# Altium PCB 02 - LcdGraphic128x64.PcbDoc
Units mm, origin at the board's own origin, x right, y up, seen from the top; angles counter-clockwise.
Board outline 80 x 80 mm, 4 copper layers (Top Layer, Internal Plane 1, Internal Plane 2, Bottom Layer), stack 0.462 mm thick; 11 components, 18 nets, 53 pads, 0 vias.
Unrouted connection lines stored in the file: 33.
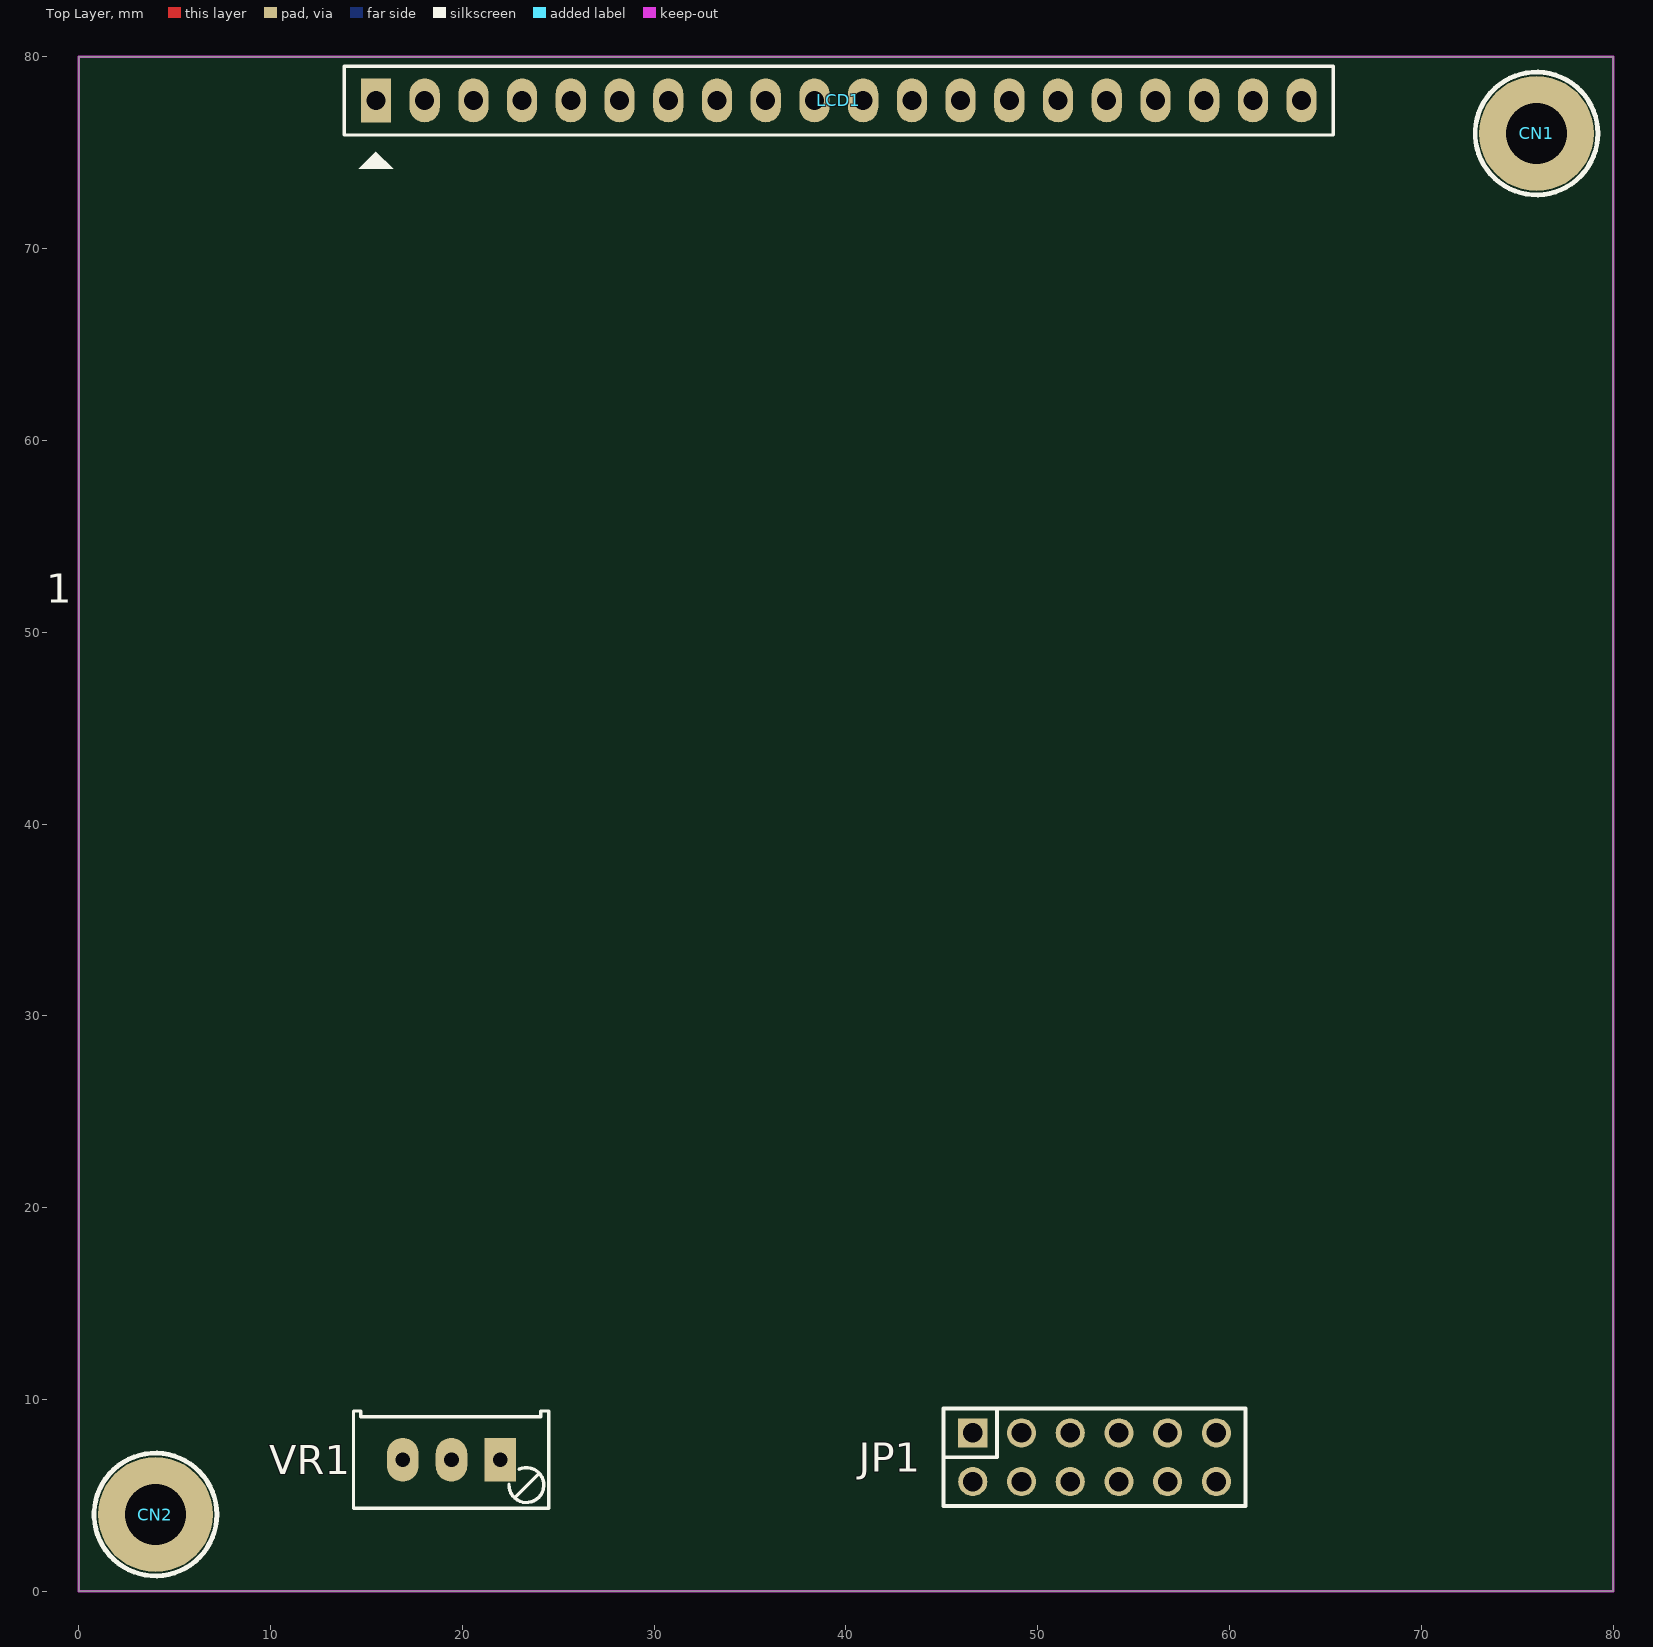
[diagram p0: Top Layer view]
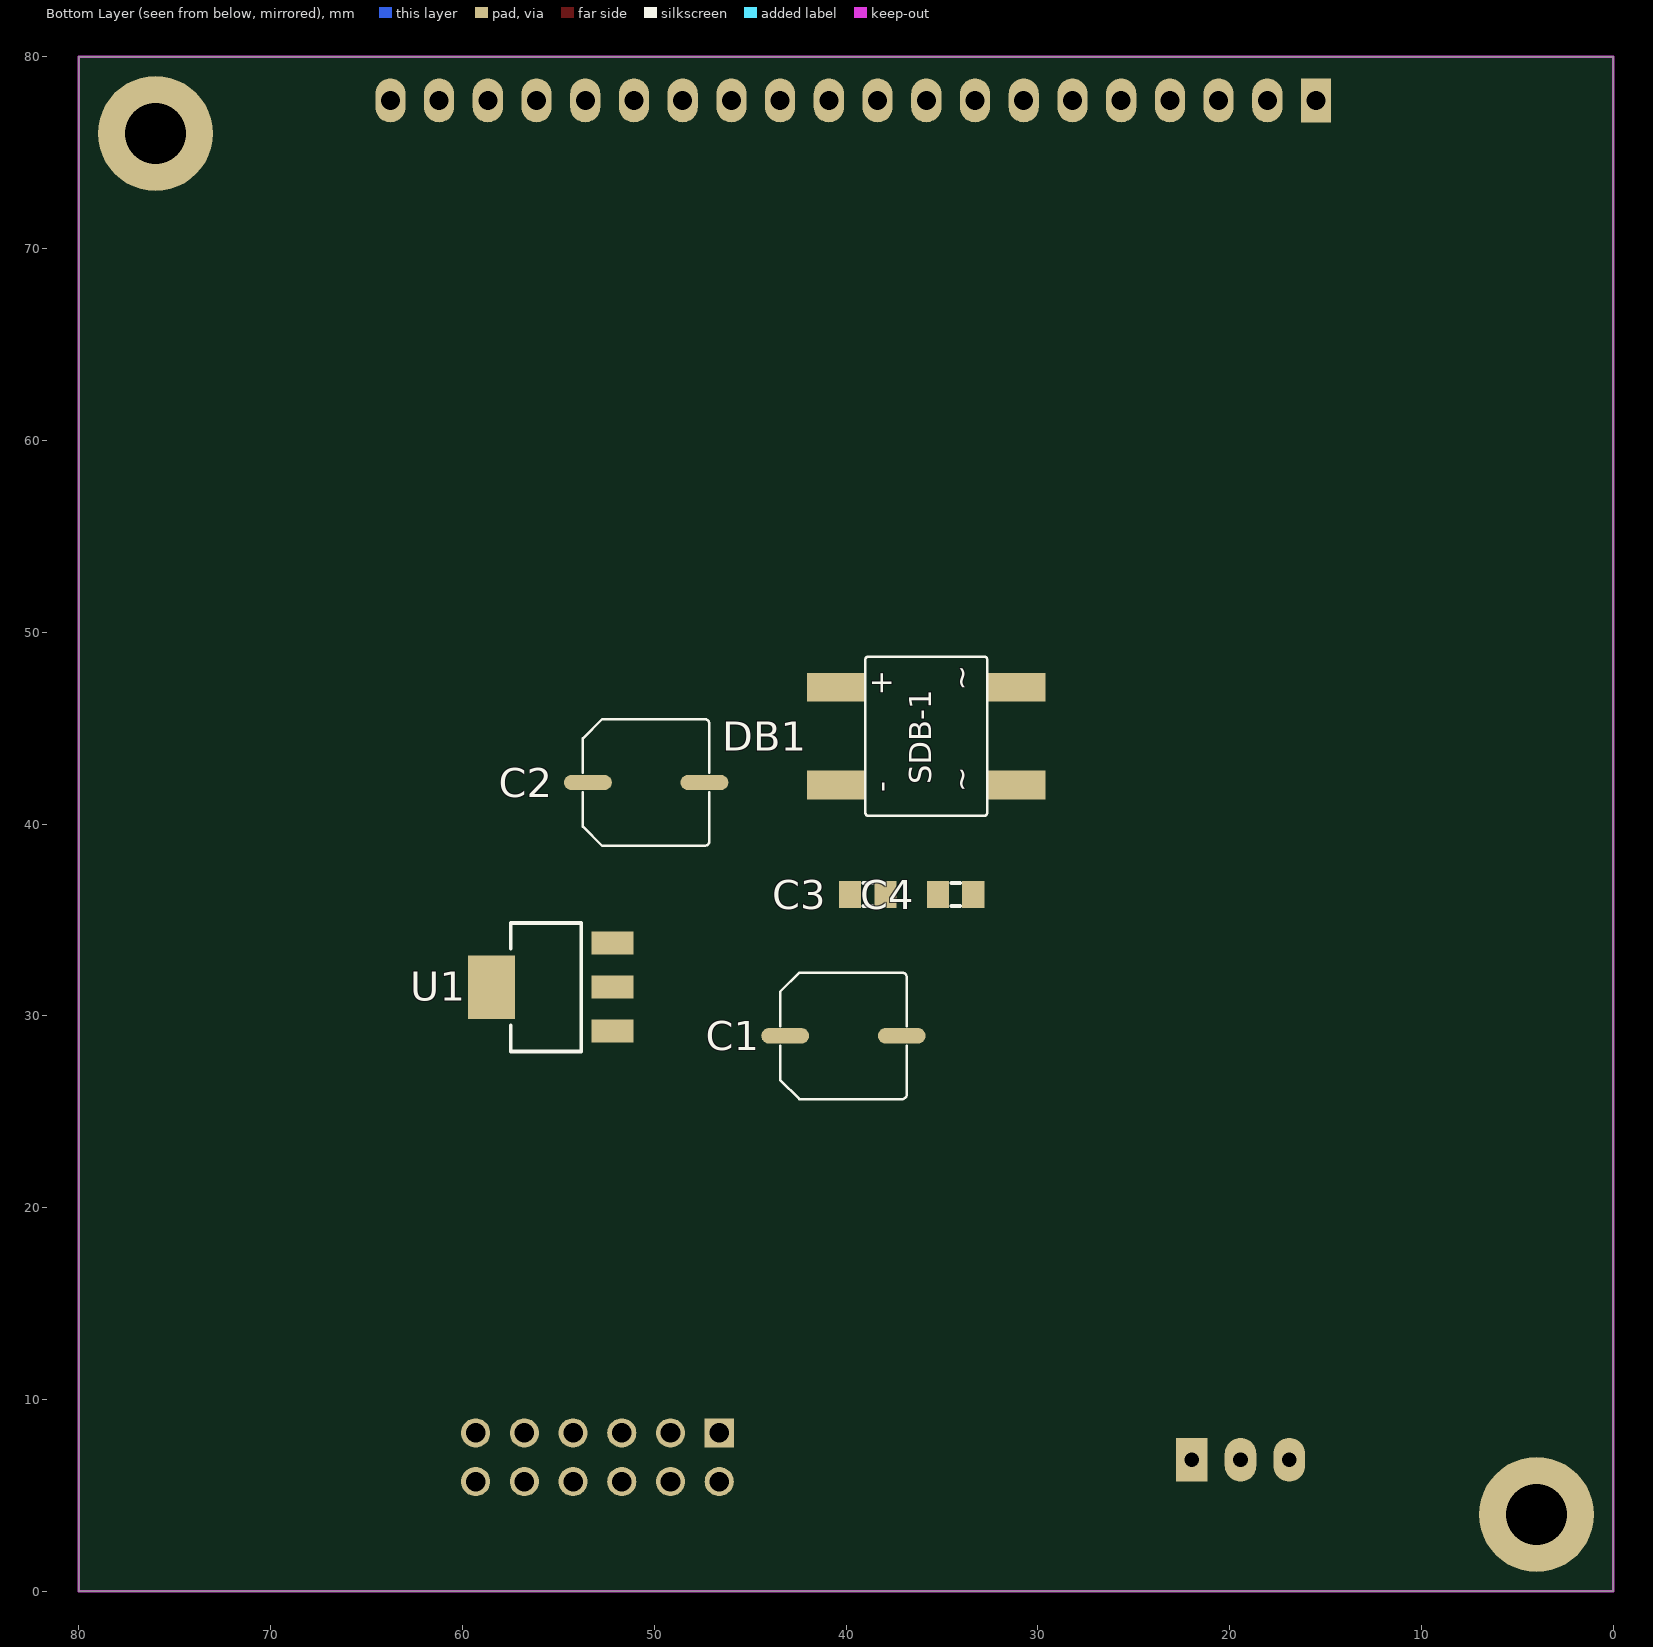
[diagram p1: Bottom Layer view, seen from below]
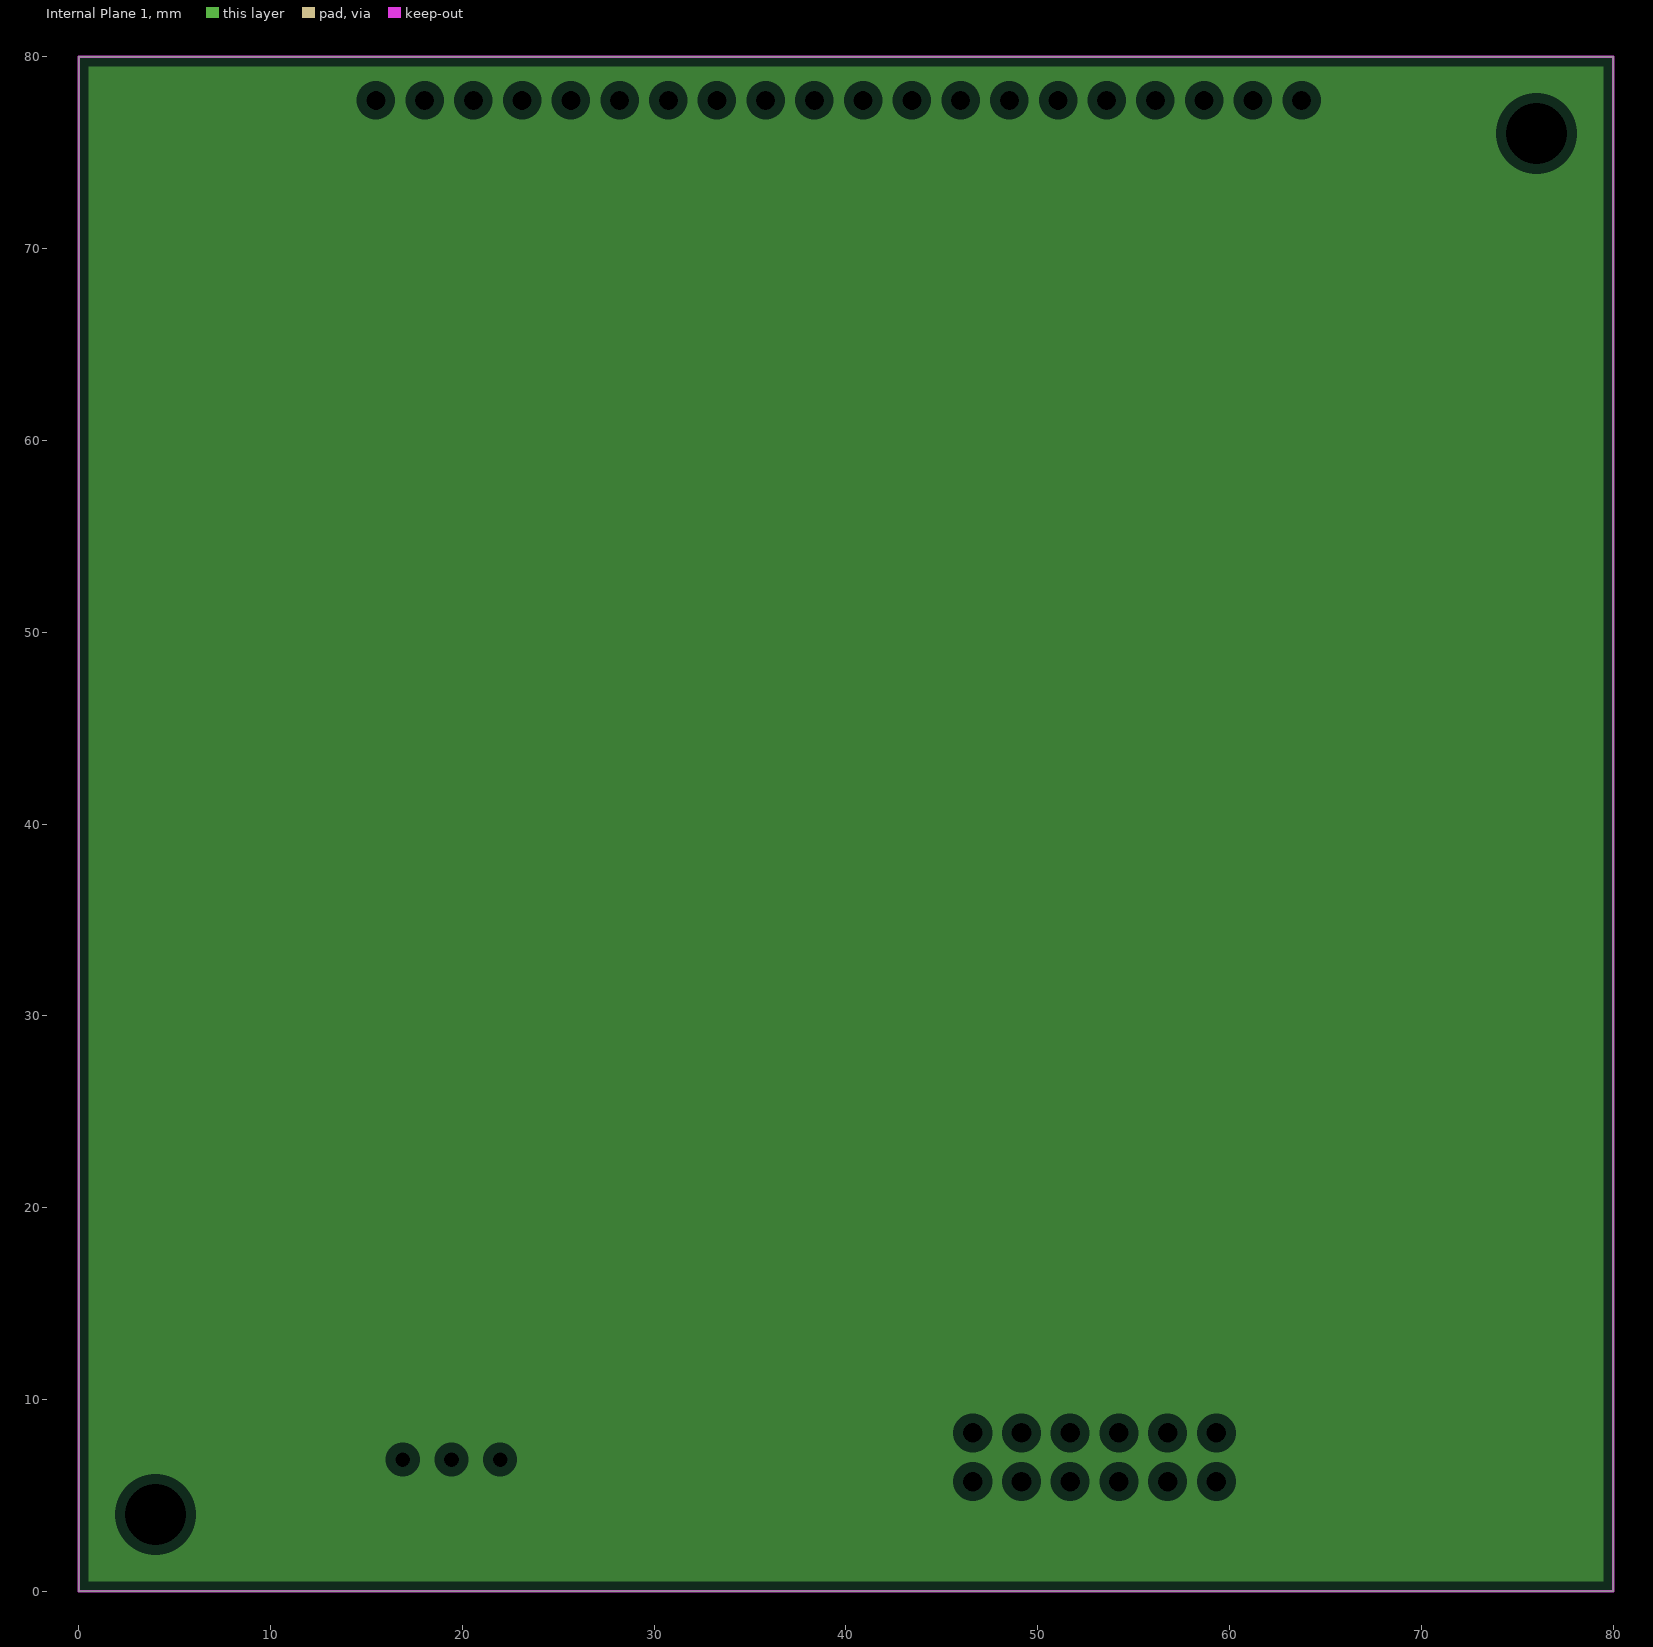
[diagram p2: Internal Plane 1, clearances drawn from the general rule]
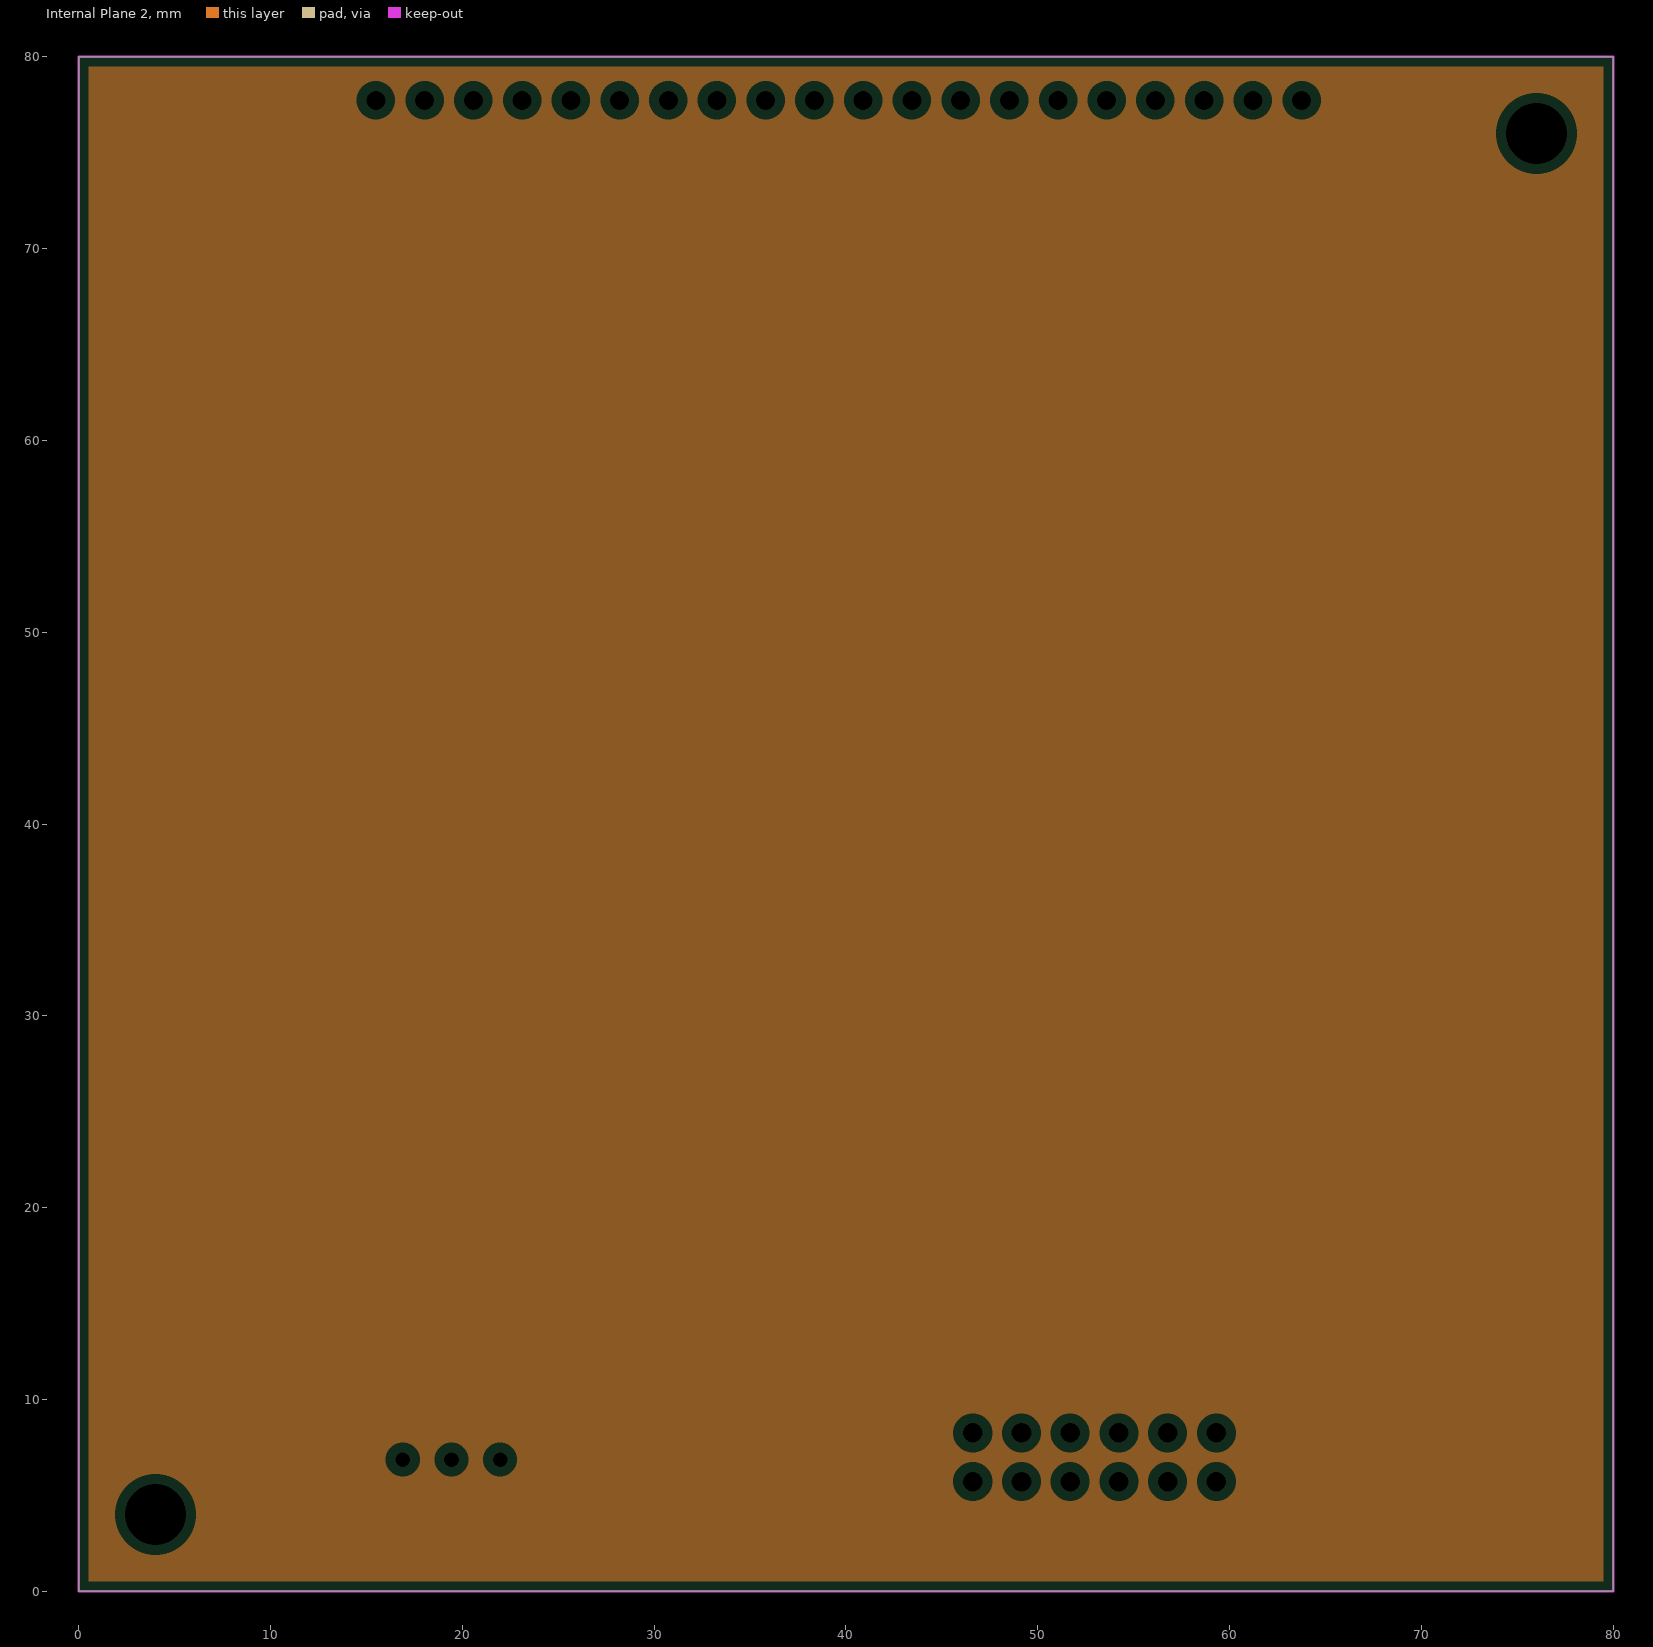
[diagram p3: Internal Plane 2, clearances drawn from the general rule]

## Layer stack, top to bottom
Top Solder: solder mask 0.0102, Solder Resist, Dk 3.5
Top Layer: signal copper 0.0356
Internal Plane 1: plane copper 0.0356
Internal Plane 2: plane copper 0.0356
Dielectric 1: dielectric 0.32, FR-4, Dk 4.8
Bottom Layer: signal copper 0.0356
Bottom Solder: solder mask 0.0102, Solder Resist, Dk 3.5

## Board outline
0,0 80,0 80,80 0,80

## Design rules (kind name [scope] priority, off if disabled: settings)
Clearance [All] p1: gap=0.2
PlaneClearance [All] p1: clearance=0.508
PlaneConnect [All] p1: planeconnectstyle=Relief reliefexpansion=0.508 reliefentries=4 reliefconductorwidth=0.254 reliefairgap=0.254
PolygonConnect [All] p1: connectstyle=Relief reliefconductorwidth=0.254 reliefentries=4 polygonreliefangle="90 Angle" airgapwidth=0.254
RoutingVias [All] p1: holewidth=0.6 width=1 viastyle="Through Hole" minholewidth=0.711 minwidth=1.27 maxholewidth=0.711 maxwidth=1.27
SolderMaskExpansion [All] p1: expansion=0.102
Width [All] p1: maxlimit=0.2 minlimit=0.2 preferedwidth=0.2
28 further rules are at their usual default settings.

## Components (designator, comment, footprint, x,y, rotation, side; value= is the part's Value field where it differs from the comment)
C1 "107" C-ALU-D6.5 40.132,28.956 r90 bottom
C2 "107" C-ALU-D6.5 50.419,42.164 r90 bottom
C3 "104" C-0805 38.862,36.322 r180 bottom
C4 "104" C-0805 34.29,36.322 r180 bottom
CN1 "COCDONGM3" M3 76,76 r90 top
CN2 "COCDONGM3" M3 4,4 r90 top
DB1 "Diode Brideg" D-DB-1A-SMD 35.814,44.577 r90 bottom
JP1 "JP6x2" JP6-C2T 52.959,6.985 r0 top
LCD1 "LCD128x64" LCD128x64 15.494,77.724 r0 top
U1 "AMS1117- 5V" LM1117 55.626,31.496 r90 bottom
VR1 "5K" VR1 21.971,6.858 r180 top

## Footprints (in the part's own frame and the unit in brackets; to place one, negate y for a bottom-side part, rotate by r counter-clockwise, add the part's x,y. Pads: shape width x height; smd on the part's side, far side on the other; paste and mask are expansions set on the pad)
C-0805 [mm] "Chip Capacitor, 2-Leads, Body 2.0x1.3mm, IPC Medium Density"
  rect 1.15x1.4 smd: 1(-0.925,0) 2(0.925,0)
  silkscreen extent -0.22,-0.6 0.23,0.6, body extent -1,-0.62 1,0.62, height 0.5
C-ALU-D6.5 [mm] "6.3x5.4mm"
  oval 0.8x2.5 smd: 1(0,3.038) 2(0,-3.038)
  silkscreen extent -3.3,-3.3 3.3,3.3, body extent -3.3,-3.8 3.3,3.8, height 6.25
D-DB-1A-SMD [mm] "DB106S"
  rect 1.5x3 smd: 1(-2.55,-4.713) 2(2.55,-4.713) 3(2.55,4.713) 4(-2.55,4.713)
  silkscreen extent -4.15,-3.18 4.15,3.18, body extent -4.15,-4.95 4.15,4.95, height 3.35
JP6-C2T [mm] "12 pins, dual row, straight, gold plating"
  rect 1.52x1.52 hole 1.02: 1(-6.35,1.27)
  round 1.52 hole 1.02: 2(-3.81,1.27) 3(-1.27,1.27) 4(1.27,1.27) 5(3.81,1.27) 6(6.35,1.27) 7(6.35,-1.27) 8(3.81,-1.27) 9(1.27,-1.27) 10(-1.27,-1.27) 11(-3.81,-1.27) 12(-6.35,-1.27)
  silkscreen extent -7.87,-2.54 7.87,2.54, body extent -7.87,-2.54 7.87,2.54, height 8.51
LCD128x64 [mil] "LCD Graphic 128x64, 20 pin"
  rect 62x90 hole 39: 1(0,0)
  oval 62x90 hole 39: 2(100,0) 3(200,0) 4(300,0) 5(400,0) 6(500,0) 7(600,0) 8(700,0) 9(800,0) 10(900,0) 11(1000,0) 12(1100,0) 13(1200,0) 14(1300,0) 15(1400,0) 16(1500,0) 17(1600,0) 18(1700,0) 19(1800,0) 20(1900,0)
  silkscreen extent -65,-140 1965,70, body extent -615,-2076 2535,50, height 476
LM1117 [mm] "SOT223, 4-Leads, Body 6.7x10.0mm (max), Pitch 2.30mm, IPC Low Density"
  rect 1.2x2.2 smd: 1(-2.3,-3.445) 2(0,-3.445) 3(2.3,-3.445)
  rect 3.3x2.45 smd: 4(0,2.855)
  silkscreen extent -3.35,-1.82 3.35,1.85, body extent -3.25,-3.44 3.25,3.45, height 1.71
M3 [mm]
  round 6 hole 3.2: 1(0,0)
  silkscreen extent -3.2,-3.2 3.2,3.2
VR1 [mil] "Variable Resistor"
  rect 65x90 hole 30: 1(0,0)
  oval 65x90 hole 30: 2(100,0) 3(200,0)
  silkscreen extent -100,-100 301,100, body extent -87,-94 289,96, height 455

## Part data
C1 C2: library part "Cap Pol3", "Polarized Capacitor (Surface Mount)"
C3 C4: library part CN
DB1: library part DB, "Convert AC to DC voltage, 4 pin"
JP1: "WR-PHD 2.54 mm Dual Socket Header"
LCD1: "LCD Graphic 128x64"
U1: library part LM1117IMP-3.3, "800mA Low-Dropout Linear Regulator"
VR1: library part VR1, "Var Resistor"

## Nets (pads, with @x,y where several pads share a name; then routed paths per layer and width w, separated by ;. In a path a pad name is that pad's centre, name@x,y a point inside that pad or via, vN(x,y) a via of type N, cw(c..) or ccw(c..) an arc to the next point about the centre after c; other vN are vias at no path point)
+5V: C1.1 C3.2 LCD1.2 LCD1.17 LCD1.19 U1.2 VR1.1
+12V: C2.1 C4.2 DB1.3 U1.3
ADJ: LCD1.3 VR1.2
D0: JP1.4 LCD1.7
D1: JP1.5 LCD1.8
D2: JP1.6 LCD1.9
D3: JP1.7 LCD1.10
D4: JP1.8 LCD1.11
D5: JP1.9 LCD1.12
D6: JP1.10 LCD1.13
D7: JP1.11 LCD1.14
EN: JP1.3 LCD1.6
GND: C1.2 C2.2 C3.1 C4.1 DB1.4 LCD1.1 LCD1.20 U1.1 U1.4 VR1.3
NetCN1_1: CN1.1 DB1.2
NetCN2_1: CN2.1 DB1.1
PSB: JP1.12 LCD1.15
RS: JP1.1 LCD1.4
RW: JP1.2 LCD1.5
pads on no net: LCD1.16 LCD1.18

## Keep-outs
Keep-Out Layer:
  the board outline again, w0.127

## Text inside footprints (layer, text, board x,y; h text height)
DB1: Bottom Overlay "~        ~" at 33.02,41.656 h2 r270; Bottom Overlay "-         +" at 37.211,41.656 h2 r270; Bottom Overlay "SDB-1" at 35.174,42.069 h2 r270